# EAGLE board SparkFun_Qwiic_CO2_Sensor_XENSIV_PAS-Panel (EAGLE 9.6.2), part 1 of 3
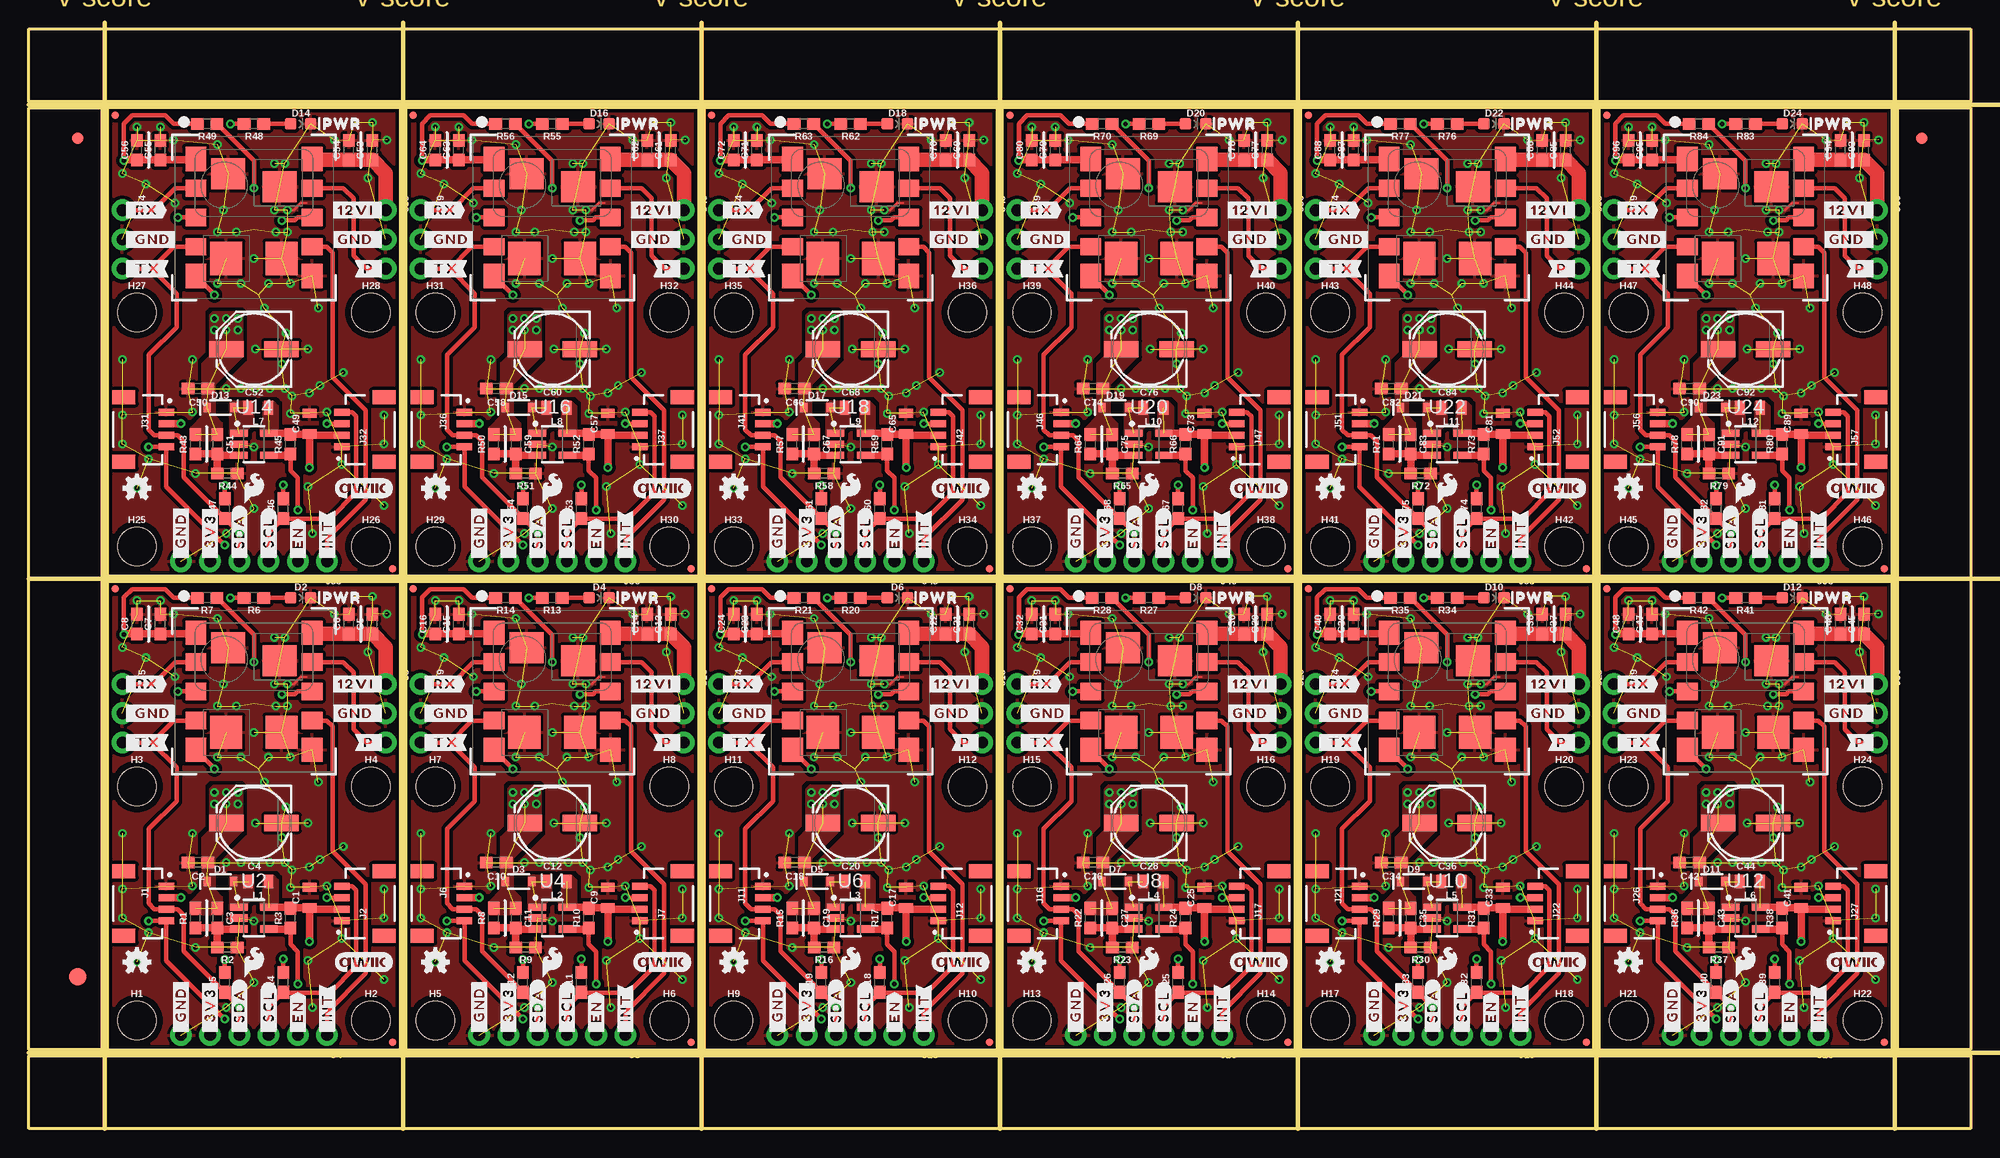
[diagram p0: board, top side]
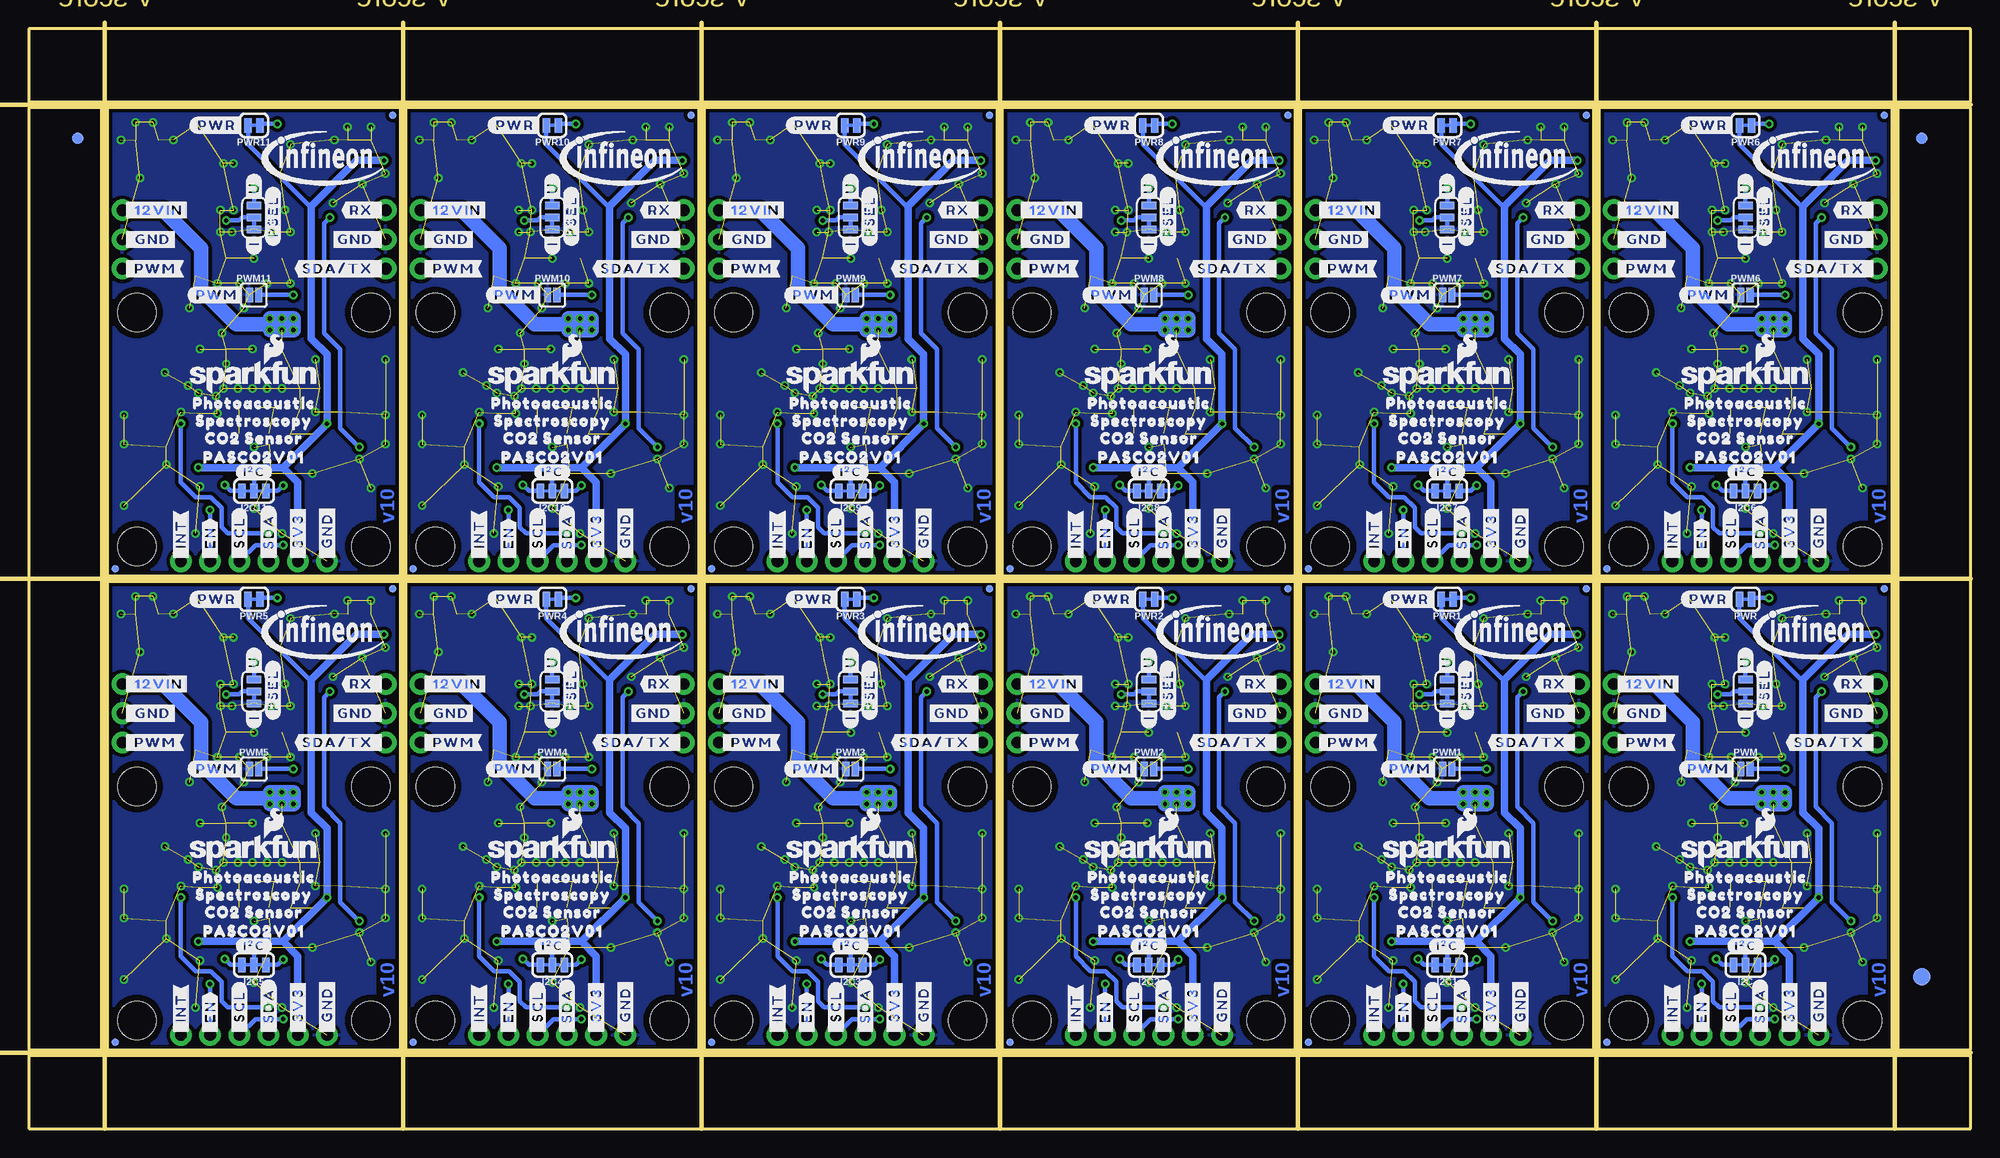
[diagram p1: board, bottom side, seen from below]

Size 168.66 x 95.5 mm. Coordinates in mm from the lower left corner, seen from the top.
Outline: 6.86,6.86 32.26,6.86 32.26,47.5 6.86,47.5 6.86,6.86
Outline: 32.77,6.86 58.17,6.86 58.17,47.5 32.77,47.5 32.77,6.86
Outline: 58.67,6.86 84.07,6.86 84.07,47.5 58.67,47.5 58.67,6.86
Outline: 84.58,6.86 109.98,6.86 109.98,47.5 84.58,47.5 84.58,6.86
Outline: 110.49,6.86 135.89,6.86 135.89,47.5 110.49,47.5 110.49,6.86
Outline: 136.4,6.86 161.8,6.86 161.8,47.5 136.4,47.5 136.4,6.86
Outline: 6.86,48.01 32.26,48.01 32.26,88.65 6.86,88.65 6.86,48.01
Outline: 32.77,48.01 58.17,48.01 58.17,88.65 32.77,88.65 32.77,48.01
Outline: 58.67,48.01 84.07,48.01 84.07,88.65 58.67,88.65 58.67,48.01
Outline: 84.58,48.01 109.98,48.01 109.98,88.65 84.58,88.65 84.58,48.01
Outline: 110.49,48.01 135.89,48.01 135.89,88.65 110.49,88.65 110.49,48.01
Outline: 136.4,48.01 161.8,48.01 161.8,88.65 136.4,88.65 136.4,48.01
Outline: 0,6.35 168.66,6.35 168.66,0 0,0 0,6.35
Outline: 162.31,88.65 168.66,88.65 168.66,6.86 162.31,6.86 162.31,88.65
Outline: 0,95.5 168.66,95.5 168.66,89.15 0,89.15 0,95.5
Outline: 0,88.65 6.35,88.65 6.35,6.86 0,6.86 0,88.65
Copper layers (1*16): Top 0.035mm / dielectric 1.5mm / Bottom 0.035mm
Design rules "SparkFun_Qwiic_CO2_Sensor_XENSIV_PAS": minimum track width 7mil, minimum drill 0.3mm, track to track 7mil, track to pad 7mil, pad to pad 7mil, via to via 7mil, smd to smd 7mil, copper to edge 7mil, drill to drill 7mil, minimum pad ring 7mil, minimum via ring 7mil, stop-mask expansion 3mil, vias tented up to drill 25mil, thermal gap 10mil
tRestrict: area 16.6,21.7 to 17,21.8; area 42.5,21.7 to 42.9,21.8; area 68.5,21.7 to 68.8,21.8; area 94.4,21.7 to 94.7,21.8; area 120.3,21.7 to 120.7,21.8; area 146.2,21.7 to 146.6,21.8; area 16.6,62.9 to 17,63; area 42.5,62.9 to 42.9,63; area 68.5,62.9 to 68.8,63; area 94.4,62.9 to 94.7,63; area 120.3,62.9 to 120.7,63; area 146.2,62.9 to 146.6,63
Milling: 10 lines

## Footprints (pad centres in the part's own frame; a part is rotated, then mirrored left to right if it is on the bottom)
0805 = smd 0.8 x 1.2: 1 -0.9,0; 2 0.9,0
0603 = smd 1.1 x 1: 1 -0.85,0; 2 0.85,0
PANASONIC_D = smd 3 x 1.4: + 2.4,0; - -2.4,0
SOD-323 = smd 0.63 x 0.83: A 1.15,0; C -1.15,0
LED-0603 = smd 1 x 1: A -0.877,0; C 0.877,0
FIDUCIAL-1X2 = smd 1 x 1: 1 0,0
FIDUCIAL-1.5X3 = smd 1.5 x 1.5: 1 0,0
FIDUCIAL-MICRO = smd 0.635 x 0.635: 1 0,0
STAND-OFF = hole 3.302: 0,0
SMT-JUMPER_3_2-NC_TRACE_SILK = smd 0.66 x 1.27: 1 -1.041,0; 2 0,0; 3 1.041,0
JST04_1MM_RA = smd 0.6 x 1.35: 1 -1.5,0; 2 -0.5,0; 3 0.5,0; 4 1.5,0 | smd 1.2 x 2: NC1 2.8,-3.675; NC2 -2.8,-3.675
1X03_NO_SILK = drill 1.016 pad 1.88: 1 0,0; 2 2.54,0; 3 5.08,0
1X06_NO_SILK = drill 1.016 pad 1.88: 1 0,0; 2 2.54,0; 3 5.08,0; 4 7.62,0; 5 10.16,0; 6 12.7,0
SMT-JUMPER_3_1-NC_TRACE_SILK = smd 0.66 x 1.27: 1 -1.041,0; 2 0,0; 3 1.041,0
SMT-JUMPER_2_NO_SILK = smd 0.635 x 1.27: 1 -0.406,0; 2 0.406,0
SMT-JUMPER_2_NC_TRACE_SILK = smd 0.66 x 1.27: 1 -0.521,0; 2 0.521,0
LG-MLGA-14-1_Z8B00206105 = smd 2.1 x 1.8: 1 -5.08,-5.05; 5 5.08,-5.05; 6 5.08,5.05; 10 -5.08,5.05 | smd 1.5 x 1.8: 2 -2.54,-5.05; 3 0,-5.05; 4 2.54,-5.05; 7 2.54,5.05; 8 0,5.05; 9 -2.54,5.05 | smd 2.7 x 2.95: 11 -2.655,2.245; 12 -3.805,-2.245 | smd 2.9 x 2.8: 13 3.55,-2.415; 14 3.55,2.415
SOT95P280X145-5M = smd 1.509 x 0.629: 1 -1.303,0.95; 2 -1.303,0; 3 -1.303,-0.95; 4 1.303,-0.95; 5 1.303,0.95

## Placement (x,y rotation side)
C1  10uF  [0805]  24.38,20.07 90 top
C2  4.7uF  [0603]  14.69,23.11 180 top
C3  470pF  [0603]  16.38,18.29 270 top
C4  47uF  [PANASONIC_D]  19.56,26.54 180 top
C5  0.1uF  [0603]  29.84,43.81 90 top
C6  10nF  [0603]  27.81,43.81 90 top
C7  0.1uF  [0603]  11.43,43.81 90 top
C8  4.7uF  [0603]  9.4,43.81 90 top
C9  10uF  [0805]  50.29,20.07 90 top
C10  4.7uF  [0603]  40.6,23.11 180 top
C11  470pF  [0603]  42.29,18.29 270 top
C12  47uF  [PANASONIC_D]  45.47,26.54 180 top
C13  0.1uF  [0603]  55.75,43.81 90 top
C14  10nF  [0603]  53.72,43.81 90 top
C15  0.1uF  [0603]  37.34,43.81 90 top
C16  4.7uF  [0603]  35.31,43.81 90 top
C17  10uF  [0805]  76.2,20.07 90 top
C18  4.7uF  [0603]  66.51,23.11 180 top
C19  470pF  [0603]  68.2,18.29 270 top
C20  47uF  [PANASONIC_D]  71.37,26.54 180 top
C21  0.1uF  [0603]  81.66,43.81 90 top
C22  10nF  [0603]  79.63,43.81 90 top
C23  0.1uF  [0603]  63.25,43.81 90 top
C24  4.7uF  [0603]  61.21,43.81 90 top
C25  10uF  [0805]  102.11,20.07 90 top
C26  4.7uF  [0603]  92.42,23.11 180 top
C27  470pF  [0603]  94.11,18.29 270 top
C28  47uF  [PANASONIC_D]  97.28,26.54 180 top
C29  0.1uF  [0603]  107.57,43.81 90 top
C30  10nF  [0603]  105.54,43.81 90 top
C31  0.1uF  [0603]  89.15,43.81 90 top
C32  4.7uF  [0603]  87.12,43.81 90 top
C33  10uF  [0805]  128.02,20.07 90 top
C34  4.7uF  [0603]  118.33,23.11 180 top
C35  470pF  [0603]  120.02,18.29 270 top
C36  47uF  [PANASONIC_D]  123.19,26.54 180 top
C37  0.1uF  [0603]  133.48,43.81 90 top
C38  10nF  [0603]  131.44,43.81 90 top
C39  0.1uF  [0603]  115.06,43.81 90 top
C40  4.7uF  [0603]  113.03,43.81 90 top
C41  10uF  [0805]  153.92,20.07 90 top
C42  4.7uF  [0603]  144.23,23.11 180 top
C43  470pF  [0603]  145.92,18.29 270 top
C44  47uF  [PANASONIC_D]  149.1,26.54 180 top
C45  0.1uF  [0603]  159.38,43.81 90 top
C46  10nF  [0603]  157.35,43.81 90 top
C47  0.1uF  [0603]  140.97,43.81 90 top
C48  4.7uF  [0603]  138.94,43.81 90 top
C49  10uF  [0805]  24.38,61.21 90 top
C50  4.7uF  [0603]  14.69,64.26 180 top
C51  470pF  [0603]  16.38,59.44 270 top
C52  47uF  [PANASONIC_D]  19.56,67.69 180 top
C53  0.1uF  [0603]  29.84,84.96 90 top
C54  10nF  [0603]  27.81,84.96 90 top
C55  0.1uF  [0603]  11.43,84.96 90 top
C56  4.7uF  [0603]  9.4,84.96 90 top
C57  10uF  [0805]  50.29,61.21 90 top
C58  4.7uF  [0603]  40.6,64.26 180 top
C59  470pF  [0603]  42.29,59.44 270 top
C60  47uF  [PANASONIC_D]  45.47,67.69 180 top
C61  0.1uF  [0603]  55.75,84.96 90 top
C62  10nF  [0603]  53.72,84.96 90 top
C63  0.1uF  [0603]  37.34,84.96 90 top
C64  4.7uF  [0603]  35.31,84.96 90 top
C65  10uF  [0805]  76.2,61.21 90 top
C66  4.7uF  [0603]  66.51,64.26 180 top
C67  470pF  [0603]  68.2,59.44 270 top
C68  47uF  [PANASONIC_D]  71.37,67.69 180 top
C69  0.1uF  [0603]  81.66,84.96 90 top
C70  10nF  [0603]  79.63,84.96 90 top
C71  0.1uF  [0603]  63.25,84.96 90 top
C72  4.7uF  [0603]  61.21,84.96 90 top
C73  10uF  [0805]  102.11,61.21 90 top
C74  4.7uF  [0603]  92.42,64.26 180 top
C75  470pF  [0603]  94.11,59.44 270 top
C76  47uF  [PANASONIC_D]  97.28,67.69 180 top
C77  0.1uF  [0603]  107.57,84.96 90 top
C78  10nF  [0603]  105.54,84.96 90 top
C79  0.1uF  [0603]  89.15,84.96 90 top
C80  4.7uF  [0603]  87.12,84.96 90 top
C81  10uF  [0805]  128.02,61.21 90 top
C82  4.7uF  [0603]  118.33,64.26 180 top
C83  470pF  [0603]  120.02,59.44 270 top
C84  47uF  [PANASONIC_D]  123.19,67.69 180 top
C85  0.1uF  [0603]  133.48,84.96 90 top
C86  10nF  [0603]  131.44,84.96 90 top
C87  0.1uF  [0603]  115.06,84.96 90 top
C88  4.7uF  [0603]  113.03,84.96 90 top
C89  10uF  [0805]  153.92,61.21 90 top
C90  4.7uF  [0603]  144.23,64.26 180 top
C91  470pF  [0603]  145.92,59.44 270 top
C92  47uF  [PANASONIC_D]  149.1,67.69 180 top
C93  0.1uF  [0603]  159.38,84.96 90 top
C94  10nF  [0603]  157.35,84.96 90 top
C95  0.1uF  [0603]  140.97,84.96 90 top
C96  4.7uF  [0603]  138.94,84.96 90 top
D1  0.5A/40V/420mV  [SOD-323]  16.64,21.46 0 top
D2  [LED-0603]  23.62,46.1 0 top
D3  0.5A/40V/420mV  [SOD-323]  42.54,21.46 0 top
D4  [LED-0603]  49.53,46.1 0 top
D5  0.5A/40V/420mV  [SOD-323]  68.45,21.46 0 top
D6  [LED-0603]  75.44,46.1 0 top
D7  0.5A/40V/420mV  [SOD-323]  94.36,21.46 0 top
D8  [LED-0603]  101.35,46.1 0 top
D9  0.5A/40V/420mV  [SOD-323]  120.27,21.46 0 top
D10  [LED-0603]  127.25,46.1 0 top
D11  0.5A/40V/420mV  [SOD-323]  146.18,21.46 0 top
D12  [LED-0603]  153.16,46.1 0 top
D13  0.5A/40V/420mV  [SOD-323]  16.64,62.61 0 top
D14  [LED-0603]  23.62,87.25 0 top
D15  0.5A/40V/420mV  [SOD-323]  42.54,62.61 0 top
D16  [LED-0603]  49.53,87.25 0 top
D17  0.5A/40V/420mV  [SOD-323]  68.45,62.61 0 top
D18  [LED-0603]  75.44,87.25 0 top
D19  0.5A/40V/420mV  [SOD-323]  94.36,62.61 0 top
D20  [LED-0603]  101.35,87.25 0 top
D21  0.5A/40V/420mV  [SOD-323]  120.27,62.61 0 top
D22  [LED-0603]  127.25,87.25 0 top
D23  0.5A/40V/420mV  [SOD-323]  146.18,62.61 0 top
D24  [LED-0603]  153.16,87.25 0 top
E$1  [FIDUCIAL-1X2]  4.23,85.98 0 top
E$2  [FIDUCIAL-1X2]  4.23,85.98 0 bottom
E$3  [FIDUCIAL-1X2]  164.42,85.98 0 top
E$4  [FIDUCIAL-1X2]  164.42,85.98 0 bottom
E$5  [FIDUCIAL-1.5X3]  4.23,13.21 0 top
E$6  [FIDUCIAL-1.5X3]  4.23,13.21 0 bottom
FD1  FIDUCIALUFIDUCIAL  [FIDUCIAL-MICRO]  31.62,7.49 0 bottom
FD2  FIDUCIALUFIDUCIAL  [FIDUCIAL-MICRO]  7.49,46.86 0 bottom
FD3  FIDUCIALUFIDUCIAL  [FIDUCIAL-MICRO]  7.49,46.86 0 top
FD4  FIDUCIALUFIDUCIAL  [FIDUCIAL-MICRO]  31.62,7.49 0 top
FD5  FIDUCIALUFIDUCIAL  [FIDUCIAL-MICRO]  57.53,7.49 0 bottom
FD6  FIDUCIALUFIDUCIAL  [FIDUCIAL-MICRO]  33.4,46.86 0 bottom
FD7  FIDUCIALUFIDUCIAL  [FIDUCIAL-MICRO]  33.4,46.86 0 top
FD8  FIDUCIALUFIDUCIAL  [FIDUCIAL-MICRO]  57.53,7.49 0 top
FD9  FIDUCIALUFIDUCIAL  [FIDUCIAL-MICRO]  83.44,7.49 0 bottom
FD10  FIDUCIALUFIDUCIAL  [FIDUCIAL-MICRO]  59.31,46.86 0 bottom
FD11  FIDUCIALUFIDUCIAL  [FIDUCIAL-MICRO]  59.31,46.86 0 top
FD12  FIDUCIALUFIDUCIAL  [FIDUCIAL-MICRO]  83.44,7.49 0 top
FD13  FIDUCIALUFIDUCIAL  [FIDUCIAL-MICRO]  109.35,7.49 0 bottom
FD14  FIDUCIALUFIDUCIAL  [FIDUCIAL-MICRO]  85.22,46.86 0 bottom
FD15  FIDUCIALUFIDUCIAL  [FIDUCIAL-MICRO]  85.22,46.86 0 top
FD16  FIDUCIALUFIDUCIAL  [FIDUCIAL-MICRO]  109.35,7.49 0 top
FD17  FIDUCIALUFIDUCIAL  [FIDUCIAL-MICRO]  135.25,7.49 0 bottom
FD18  FIDUCIALUFIDUCIAL  [FIDUCIAL-MICRO]  111.12,46.86 0 bottom
FD19  FIDUCIALUFIDUCIAL  [FIDUCIAL-MICRO]  111.12,46.86 0 top
FD20  FIDUCIALUFIDUCIAL  [FIDUCIAL-MICRO]  135.25,7.49 0 top
FD21  FIDUCIALUFIDUCIAL  [FIDUCIAL-MICRO]  161.16,7.49 0 bottom
FD22  FIDUCIALUFIDUCIAL  [FIDUCIAL-MICRO]  137.03,46.86 0 bottom
FD23  FIDUCIALUFIDUCIAL  [FIDUCIAL-MICRO]  137.03,46.86 0 top
FD24  FIDUCIALUFIDUCIAL  [FIDUCIAL-MICRO]  161.16,7.49 0 top
FD25  FIDUCIALUFIDUCIAL  [FIDUCIAL-MICRO]  31.62,48.64 0 bottom
FD26  FIDUCIALUFIDUCIAL  [FIDUCIAL-MICRO]  7.49,88.01 0 bottom
FD27  FIDUCIALUFIDUCIAL  [FIDUCIAL-MICRO]  7.49,88.01 0 top
FD28  FIDUCIALUFIDUCIAL  [FIDUCIAL-MICRO]  31.62,48.64 0 top
FD29  FIDUCIALUFIDUCIAL  [FIDUCIAL-MICRO]  57.53,48.64 0 bottom
FD30  FIDUCIALUFIDUCIAL  [FIDUCIAL-MICRO]  33.4,88.01 0 bottom
FD31  FIDUCIALUFIDUCIAL  [FIDUCIAL-MICRO]  33.4,88.01 0 top
FD32  FIDUCIALUFIDUCIAL  [FIDUCIAL-MICRO]  57.53,48.64 0 top
FD33  FIDUCIALUFIDUCIAL  [FIDUCIAL-MICRO]  83.44,48.64 0 bottom
FD34  FIDUCIALUFIDUCIAL  [FIDUCIAL-MICRO]  59.31,88.01 0 bottom
FD35  FIDUCIALUFIDUCIAL  [FIDUCIAL-MICRO]  59.31,88.01 0 top
FD36  FIDUCIALUFIDUCIAL  [FIDUCIAL-MICRO]  83.44,48.64 0 top
FD37  FIDUCIALUFIDUCIAL  [FIDUCIAL-MICRO]  109.35,48.64 0 bottom
FD38  FIDUCIALUFIDUCIAL  [FIDUCIAL-MICRO]  85.22,88.01 0 bottom
FD39  FIDUCIALUFIDUCIAL  [FIDUCIAL-MICRO]  85.22,88.01 0 top
FD40  FIDUCIALUFIDUCIAL  [FIDUCIAL-MICRO]  109.35,48.64 0 top
FD41  FIDUCIALUFIDUCIAL  [FIDUCIAL-MICRO]  135.25,48.64 0 bottom
FD42  FIDUCIALUFIDUCIAL  [FIDUCIAL-MICRO]  111.12,88.01 0 bottom
FD43  FIDUCIALUFIDUCIAL  [FIDUCIAL-MICRO]  111.12,88.01 0 top
FD44  FIDUCIALUFIDUCIAL  [FIDUCIAL-MICRO]  135.25,48.64 0 top
FD45  FIDUCIALUFIDUCIAL  [FIDUCIAL-MICRO]  161.16,48.64 0 bottom
FD46  FIDUCIALUFIDUCIAL  [FIDUCIAL-MICRO]  137.03,88.01 0 bottom
FD47  FIDUCIALUFIDUCIAL  [FIDUCIAL-MICRO]  137.03,88.01 0 top
FD48  FIDUCIALUFIDUCIAL  [FIDUCIAL-MICRO]  161.16,48.64 0 top
H1  STAND-OFF  [STAND-OFF]  9.4,9.4 0 top
H2  STAND-OFF  [STAND-OFF]  29.72,9.4 0 top
H3  STAND-OFF  [STAND-OFF]  9.4,29.72 0 top
H4  STAND-OFF  [STAND-OFF]  29.72,29.72 0 top
H5  STAND-OFF  [STAND-OFF]  35.31,9.4 0 top
H6  STAND-OFF  [STAND-OFF]  55.63,9.4 0 top
H7  STAND-OFF  [STAND-OFF]  35.31,29.72 0 top
H8  STAND-OFF  [STAND-OFF]  55.63,29.72 0 top
H9  STAND-OFF  [STAND-OFF]  61.21,9.4 0 top
H10  STAND-OFF  [STAND-OFF]  81.53,9.4 0 top
H11  STAND-OFF  [STAND-OFF]  61.21,29.72 0 top
H12  STAND-OFF  [STAND-OFF]  81.53,29.72 0 top
H13  STAND-OFF  [STAND-OFF]  87.12,9.4 0 top
H14  STAND-OFF  [STAND-OFF]  107.44,9.4 0 top
H15  STAND-OFF  [STAND-OFF]  87.12,29.72 0 top
H16  STAND-OFF  [STAND-OFF]  107.44,29.72 0 top
H17  STAND-OFF  [STAND-OFF]  113.03,9.4 0 top
H18  STAND-OFF  [STAND-OFF]  133.35,9.4 0 top
H19  STAND-OFF  [STAND-OFF]  113.03,29.72 0 top
H20  STAND-OFF  [STAND-OFF]  133.35,29.72 0 top
H21  STAND-OFF  [STAND-OFF]  138.94,9.4 0 top
H22  STAND-OFF  [STAND-OFF]  159.26,9.4 0 top
H23  STAND-OFF  [STAND-OFF]  138.94,29.72 0 top
H24  STAND-OFF  [STAND-OFF]  159.26,29.72 0 top
H25  STAND-OFF  [STAND-OFF]  9.4,50.55 0 top
H26  STAND-OFF  [STAND-OFF]  29.72,50.55 0 top
H27  STAND-OFF  [STAND-OFF]  9.4,70.87 0 top
H28  STAND-OFF  [STAND-OFF]  29.72,70.87 0 top
H29  STAND-OFF  [STAND-OFF]  35.31,50.55 0 top
H30  STAND-OFF  [STAND-OFF]  55.63,50.55 0 top
H31  STAND-OFF  [STAND-OFF]  35.31,70.87 0 top
H32  STAND-OFF  [STAND-OFF]  55.63,70.87 0 top
H33  STAND-OFF  [STAND-OFF]  61.21,50.55 0 top
H34  STAND-OFF  [STAND-OFF]  81.53,50.55 0 top
H35  STAND-OFF  [STAND-OFF]  61.21,70.87 0 top
H36  STAND-OFF  [STAND-OFF]  81.53,70.87 0 top
H37  STAND-OFF  [STAND-OFF]  87.12,50.55 0 top
H38  STAND-OFF  [STAND-OFF]  107.44,50.55 0 top
H39  STAND-OFF  [STAND-OFF]  87.12,70.87 0 top
H40  STAND-OFF  [STAND-OFF]  107.44,70.87 0 top
H41  STAND-OFF  [STAND-OFF]  113.03,50.55 0 top
H42  STAND-OFF  [STAND-OFF]  133.35,50.55 0 top
H43  STAND-OFF  [STAND-OFF]  113.03,70.87 0 top
H44  STAND-OFF  [STAND-OFF]  133.35,70.87 0 top
H45  STAND-OFF  [STAND-OFF]  138.94,50.55 0 top
H46  STAND-OFF  [STAND-OFF]  159.26,50.55 0 top
H47  STAND-OFF  [STAND-OFF]  138.94,70.87 0 top
H48  STAND-OFF  [STAND-OFF]  159.26,70.87 0 top
I2C  JUMPER-SMT_3_2-NC_TRACE_SILK  [SMT-JUMPER_3_2-NC_TRACE_SILK]  19.56,14.22 180 bottom
I2C1  JUMPER-SMT_3_2-NC_TRACE_SILK  [SMT-JUMPER_3_2-NC_TRACE_SILK]  45.47,14.22 180 bottom
I2C2  JUMPER-SMT_3_2-NC_TRACE_SILK  [SMT-JUMPER_3_2-NC_TRACE_SILK]  71.37,14.22 180 bottom
I2C3  JUMPER-SMT_3_2-NC_TRACE_SILK  [SMT-JUMPER_3_2-NC_TRACE_SILK]  97.28,14.22 180 bottom
I2C4  JUMPER-SMT_3_2-NC_TRACE_SILK  [SMT-JUMPER_3_2-NC_TRACE_SILK]  123.19,14.22 180 bottom
I2C5  JUMPER-SMT_3_2-NC_TRACE_SILK  [SMT-JUMPER_3_2-NC_TRACE_SILK]  149.1,14.22 180 bottom
I2C6  JUMPER-SMT_3_2-NC_TRACE_SILK  [SMT-JUMPER_3_2-NC_TRACE_SILK]  19.56,55.37 180 bottom
I2C7  JUMPER-SMT_3_2-NC_TRACE_SILK  [SMT-JUMPER_3_2-NC_TRACE_SILK]  45.47,55.37 180 bottom
I2C8  JUMPER-SMT_3_2-NC_TRACE_SILK  [SMT-JUMPER_3_2-NC_TRACE_SILK]  71.37,55.37 180 bottom
I2C9  JUMPER-SMT_3_2-NC_TRACE_SILK  [SMT-JUMPER_3_2-NC_TRACE_SILK]  97.28,55.37 180 bottom
I2C10  JUMPER-SMT_3_2-NC_TRACE_SILK  [SMT-JUMPER_3_2-NC_TRACE_SILK]  123.19,55.37 180 bottom
I2C11  JUMPER-SMT_3_2-NC_TRACE_SILK  [SMT-JUMPER_3_2-NC_TRACE_SILK]  149.1,55.37 180 bottom
J1  QWIIC_RA  [JST04_1MM_RA]  11.94,19.56 270 top
J2  QWIIC_RA  [JST04_1MM_RA]  27.18,19.56 90 top
J3  [1X03_NO_SILK]  30.99,38.61 270 top
J4  [1X06_NO_SILK]  25.91,8.13 180 top
J5  [1X03_NO_SILK]  8.13,38.61 270 top
J6  QWIIC_RA  [JST04_1MM_RA]  37.85,19.56 270 top
J7  QWIIC_RA  [JST04_1MM_RA]  53.09,19.56 90 top
J8  [1X06_NO_SILK]  51.82,8.13 180 top
J9  [1X03_NO_SILK]  34.04,38.61 270 top
J10  [1X03_NO_SILK]  56.9,38.61 270 top
J11  QWIIC_RA  [JST04_1MM_RA]  63.75,19.56 270 top
J12  QWIIC_RA  [JST04_1MM_RA]  78.99,19.56 90 top
J13  [1X06_NO_SILK]  77.72,8.13 180 top
J14  [1X03_NO_SILK]  59.94,38.61 270 top
J15  [1X03_NO_SILK]  82.8,38.61 270 top
J16  QWIIC_RA  [JST04_1MM_RA]  89.66,19.56 270 top
J17  QWIIC_RA  [JST04_1MM_RA]  104.9,19.56 90 top
J18  [1X06_NO_SILK]  103.63,8.13 180 top
J19  [1X03_NO_SILK]  85.85,38.61 270 top
J20  [1X03_NO_SILK]  108.71,38.61 270 top
J21  QWIIC_RA  [JST04_1MM_RA]  115.57,19.56 270 top
J22  QWIIC_RA  [JST04_1MM_RA]  130.81,19.56 90 top
J23  [1X06_NO_SILK]  129.54,8.13 180 top
J24  [1X03_NO_SILK]  111.76,38.61 270 top
J25  [1X03_NO_SILK]  134.62,38.61 270 top
J26  QWIIC_RA  [JST04_1MM_RA]  141.48,19.56 270 top
J27  QWIIC_RA  [JST04_1MM_RA]  156.72,19.56 90 top
J28  [1X06_NO_SILK]  155.45,8.13 180 top
J29  [1X03_NO_SILK]  137.67,38.61 270 top
J30  [1X03_NO_SILK]  160.53,38.61 270 top
J31  QWIIC_RA  [JST04_1MM_RA]  11.94,60.71 270 top
J32  QWIIC_RA  [JST04_1MM_RA]  27.18,60.71 90 top
J33  [1X06_NO_SILK]  25.91,49.28 180 top
J34  [1X03_NO_SILK]  8.13,79.76 270 top
J35  [1X03_NO_SILK]  30.99,79.76 270 top
J36  QWIIC_RA  [JST04_1MM_RA]  37.85,60.71 270 top
J37  QWIIC_RA  [JST04_1MM_RA]  53.09,60.71 90 top
J38  [1X06_NO_SILK]  51.82,49.28 180 top
J39  [1X03_NO_SILK]  34.04,79.76 270 top
J40  [1X03_NO_SILK]  56.9,79.76 270 top
J41  QWIIC_RA  [JST04_1MM_RA]  63.75,60.71 270 top
J42  QWIIC_RA  [JST04_1MM_RA]  78.99,60.71 90 top
J43  [1X06_NO_SILK]  77.72,49.28 180 top
J44  [1X03_NO_SILK]  59.94,79.76 270 top
J45  [1X03_NO_SILK]  82.8,79.76 270 top
J46  QWIIC_RA  [JST04_1MM_RA]  89.66,60.71 270 top
J47  QWIIC_RA  [JST04_1MM_RA]  104.9,60.71 90 top
J48  [1X06_NO_SILK]  103.63,49.28 180 top
J49  [1X03_NO_SILK]  85.85,79.76 270 top
J50  [1X03_NO_SILK]  108.71,79.76 270 top
J51  QWIIC_RA  [JST04_1MM_RA]  115.57,60.71 270 top
J52  QWIIC_RA  [JST04_1MM_RA]  130.81,60.71 90 top
J53  [1X06_NO_SILK]  129.54,49.28 180 top
J54  [1X03_NO_SILK]  111.76,79.76 270 top
J55  [1X03_NO_SILK]  134.62,79.76 270 top
J56  QWIIC_RA  [JST04_1MM_RA]  141.48,60.71 270 top
J57  QWIIC_RA  [JST04_1MM_RA]  156.72,60.71 90 top
J58  [1X06_NO_SILK]  155.45,49.28 180 top
J59  [1X03_NO_SILK]  137.67,79.76 270 top
J60  [1X03_NO_SILK]  160.53,79.76 270 top
L1  10uH  [0805]  19.94,21.46 180 top
L2  10uH  [0805]  45.85,21.46 180 top
L3  10uH  [0805]  71.76,21.46 180 top
L4  10uH  [0805]  97.66,21.46 180 top
L5  10uH  [0805]  123.57,21.46 180 top
L6  10uH  [0805]  149.48,21.46 180 top
L7  10uH  [0805]  19.94,62.61 180 top
L8  10uH  [0805]  45.85,62.61 180 top
L9  10uH  [0805]  71.76,62.61 180 top
L10  10uH  [0805]  97.66,62.61 180 top
L11  10uH  [0805]  123.57,62.61 180 top
L12  10uH  [0805]  149.48,62.61 180 top
LOGO1  SFE_LOGO_NAME_FLAME.1_INCH  [SFE_LOGO_NAME_FLAME_.1]  19.56,24.13 0 bottom
LOGO2  QWIIC_LOGO_5MM  [QWIIC_5MM]  29.08,14.48 0 top
LOGO3  OSHW-LOGOMINI  [OSHW-LOGO-MINI]  9.4,14.48 0 top
LOGO4  SFE_LOGO_NAME_FLAME.1_INCH  [SFE_LOGO_NAME_FLAME_.1]  45.47,24.13 0 bottom
LOGO5  QWIIC_LOGO_5MM  [QWIIC_5MM]  54.99,14.48 0 top
LOGO6  OSHW-LOGOMINI  [OSHW-LOGO-MINI]  35.31,14.48 0 top
LOGO7  SFE_LOGO_NAME_FLAME.1_INCH  [SFE_LOGO_NAME_FLAME_.1]  71.37,24.13 0 bottom
LOGO8  QWIIC_LOGO_5MM  [QWIIC_5MM]  80.9,14.48 0 top
LOGO9  OSHW-LOGOMINI  [OSHW-LOGO-MINI]  61.21,14.48 0 top
LOGO10  SFE_LOGO_NAME_FLAME.1_INCH  [SFE_LOGO_NAME_FLAME_.1]  97.28,24.13 0 bottom
LOGO11  QWIIC_LOGO_5MM  [QWIIC_5MM]  106.81,14.48 0 top
LOGO12  OSHW-LOGOMINI  [OSHW-LOGO-MINI]  87.12,14.48 0 top
LOGO13  SFE_LOGO_NAME_FLAME.1_INCH  [SFE_LOGO_NAME_FLAME_.1]  123.19,24.13 0 bottom
LOGO14  QWIIC_LOGO_5MM  [QWIIC_5MM]  132.72,14.48 0 top
LOGO15  OSHW-LOGOMINI  [OSHW-LOGO-MINI]  113.03,14.48 0 top
LOGO16  SFE_LOGO_NAME_FLAME.1_INCH  [SFE_LOGO_NAME_FLAME_.1]  149.1,24.13 0 bottom
LOGO17  QWIIC_LOGO_5MM  [QWIIC_5MM]  158.62,14.48 0 top
LOGO18  OSHW-LOGOMINI  [OSHW-LOGO-MINI]  138.94,14.48 0 top
LOGO19  SFE_LOGO_NAME_FLAME.1_INCH  [SFE_LOGO_NAME_FLAME_.1]  19.56,65.28 0 bottom
LOGO20  QWIIC_LOGO_5MM  [QWIIC_5MM]  29.08,55.63 0 top
LOGO21  OSHW-LOGOMINI  [OSHW-LOGO-MINI]  9.4,55.63 0 top
LOGO22  SFE_LOGO_NAME_FLAME.1_INCH  [SFE_LOGO_NAME_FLAME_.1]  45.47,65.28 0 bottom
LOGO23  QWIIC_LOGO_5MM  [QWIIC_5MM]  54.99,55.63 0 top
LOGO24  OSHW-LOGOMINI  [OSHW-LOGO-MINI]  35.31,55.63 0 top
LOGO25  SFE_LOGO_NAME_FLAME.1_INCH  [SFE_LOGO_NAME_FLAME_.1]  71.37,65.28 0 bottom
LOGO26  QWIIC_LOGO_5MM  [QWIIC_5MM]  80.9,55.63 0 top
LOGO27  OSHW-LOGOMINI  [OSHW-LOGO-MINI]  61.21,55.63 0 top
LOGO28  SFE_LOGO_NAME_FLAME.1_INCH  [SFE_LOGO_NAME_FLAME_.1]  97.28,65.28 0 bottom
LOGO29  QWIIC_LOGO_5MM  [QWIIC_5MM]  106.81,55.63 0 top
LOGO30  OSHW-LOGOMINI  [OSHW-LOGO-MINI]  87.12,55.63 0 top
LOGO31  SFE_LOGO_NAME_FLAME.1_INCH  [SFE_LOGO_NAME_FLAME_.1]  123.19,65.28 0 bottom
LOGO32  QWIIC_LOGO_5MM  [QWIIC_5MM]  132.72,55.63 0 top
LOGO33  OSHW-LOGOMINI  [OSHW-LOGO-MINI]  113.03,55.63 0 top
LOGO34  SFE_LOGO_NAME_FLAME.1_INCH  [SFE_LOGO_NAME_FLAME_.1]  149.1,65.28 0 bottom
LOGO35  QWIIC_LOGO_5MM  [QWIIC_5MM]  158.62,55.63 0 top
LOGO36  OSHW-LOGOMINI  [OSHW-LOGO-MINI]  138.94,55.63 0 top
PSEL  JUMPER-SMT_3_1-NC_TRACE_SILK  [SMT-JUMPER_3_1-NC_TRACE_SILK]  19.56,37.97 270 bottom
PSEL1  JUMPER-SMT_3_1-NC_TRACE_SILK  [SMT-JUMPER_3_1-NC_TRACE_SILK]  45.47,37.97 270 bottom
PSEL2  JUMPER-SMT_3_1-NC_TRACE_SILK  [SMT-JUMPER_3_1-NC_TRACE_SILK]  71.37,37.97 270 bottom
PSEL3  JUMPER-SMT_3_1-NC_TRACE_SILK  [SMT-JUMPER_3_1-NC_TRACE_SILK]  97.28,37.97 270 bottom
PSEL4  JUMPER-SMT_3_1-NC_TRACE_SILK  [SMT-JUMPER_3_1-NC_TRACE_SILK]  123.19,37.97 270 bottom
PSEL5  JUMPER-SMT_3_1-NC_TRACE_SILK  [SMT-JUMPER_3_1-NC_TRACE_SILK]  149.1,37.97 270 bottom
PSEL6  JUMPER-SMT_3_1-NC_TRACE_SILK  [SMT-JUMPER_3_1-NC_TRACE_SILK]  19.56,79.12 270 bottom
PSEL7  JUMPER-SMT_3_1-NC_TRACE_SILK  [SMT-JUMPER_3_1-NC_TRACE_SILK]  45.47,79.12 270 bottom
PSEL8  JUMPER-SMT_3_1-NC_TRACE_SILK  [SMT-JUMPER_3_1-NC_TRACE_SILK]  71.37,79.12 270 bottom
PSEL9  JUMPER-SMT_3_1-NC_TRACE_SILK  [SMT-JUMPER_3_1-NC_TRACE_SILK]  97.28,79.12 270 bottom
PSEL10  JUMPER-SMT_3_1-NC_TRACE_SILK  [SMT-JUMPER_3_1-NC_TRACE_SILK]  123.19,79.12 270 bottom
PSEL11  JUMPER-SMT_3_1-NC_TRACE_SILK  [SMT-JUMPER_3_1-NC_TRACE_SILK]  149.1,79.12 270 bottom
PWM  JUMPER-SMT_2_NO_SILK  [SMT-JUMPER_2_NO_SILK]  19.56,31.24 0 bottom
PWM1  JUMPER-SMT_2_NO_SILK  [SMT-JUMPER_2_NO_SILK]  45.47,31.24 0 bottom
PWM2  JUMPER-SMT_2_NO_SILK  [SMT-JUMPER_2_NO_SILK]  71.37,31.24 0 bottom
PWM3  JUMPER-SMT_2_NO_SILK  [SMT-JUMPER_2_NO_SILK]  97.28,31.24 0 bottom
PWM4  JUMPER-SMT_2_NO_SILK  [SMT-JUMPER_2_NO_SILK]  123.19,31.24 0 bottom
PWM5  JUMPER-SMT_2_NO_SILK  [SMT-JUMPER_2_NO_SILK]  149.1,31.24 0 bottom
PWM6  JUMPER-SMT_2_NO_SILK  [SMT-JUMPER_2_NO_SILK]  19.56,72.39 0 bottom
PWM7  JUMPER-SMT_2_NO_SILK  [SMT-JUMPER_2_NO_SILK]  45.47,72.39 0 bottom
PWM8  JUMPER-SMT_2_NO_SILK  [SMT-JUMPER_2_NO_SILK]  71.37,72.39 0 bottom
PWM9  JUMPER-SMT_2_NO_SILK  [SMT-JUMPER_2_NO_SILK]  97.28,72.39 0 bottom
PWM10  JUMPER-SMT_2_NO_SILK  [SMT-JUMPER_2_NO_SILK]  123.19,72.39 0 bottom
PWM11  JUMPER-SMT_2_NO_SILK  [SMT-JUMPER_2_NO_SILK]  149.1,72.39 0 bottom
PWR  JUMPER-SMT_2_NC_TRACE_SILK  [SMT-JUMPER_2_NC_TRACE_SILK]  19.56,45.97 180 bottom
PWR1  JUMPER-SMT_2_NC_TRACE_SILK  [SMT-JUMPER_2_NC_TRACE_SILK]  45.47,45.97 180 bottom
PWR2  JUMPER-SMT_2_NC_TRACE_SILK  [SMT-JUMPER_2_NC_TRACE_SILK]  71.37,45.97 180 bottom
PWR3  JUMPER-SMT_2_NC_TRACE_SILK  [SMT-JUMPER_2_NC_TRACE_SILK]  97.28,45.97 180 bottom
PWR4  JUMPER-SMT_2_NC_TRACE_SILK  [SMT-JUMPER_2_NC_TRACE_SILK]  123.19,45.97 180 bottom
PWR5  JUMPER-SMT_2_NC_TRACE_SILK  [SMT-JUMPER_2_NC_TRACE_SILK]  149.1,45.97 180 bottom
PWR6  JUMPER-SMT_2_NC_TRACE_SILK  [SMT-JUMPER_2_NC_TRACE_SILK]  19.56,87.12 180 bottom
PWR7  JUMPER-SMT_2_NC_TRACE_SILK  [SMT-JUMPER_2_NC_TRACE_SILK]  45.47,87.12 180 bottom
PWR8  JUMPER-SMT_2_NC_TRACE_SILK  [SMT-JUMPER_2_NC_TRACE_SILK]  71.37,87.12 180 bottom
PWR9  JUMPER-SMT_2_NC_TRACE_SILK  [SMT-JUMPER_2_NC_TRACE_SILK]  97.28,87.12 180 bottom
PWR10  JUMPER-SMT_2_NC_TRACE_SILK  [SMT-JUMPER_2_NC_TRACE_SILK]  123.19,87.12 180 bottom
PWR11  JUMPER-SMT_2_NC_TRACE_SILK  [SMT-JUMPER_2_NC_TRACE_SILK]  149.1,87.12 180 bottom
R1  47k  [0603]  14.48,18.29 90 top
R2  5.62k  [0603]  17.25,15.75 180 top
R3  100k  [0603]  22.73,18.29 90 top
R4  2.2k  [0603]  22.1,12.7 90 top
R5  2.2k  [0603]  17.02,12.7 90 top
R6  4.7k  [0603]  19.56,46.1 180 top
R7  10k  [0603]  15.49,46.1 180 top
R8  47k  [0603]  40.39,18.29 90 top
R9  5.62k  [0603]  43.15,15.75 180 top
R10  100k  [0603]  48.64,18.29 90 top
R11  2.2k  [0603]  48.01,12.7 90 top
R12  2.2k  [0603]  42.93,12.7 90 top
R13  4.7k  [0603]  45.47,46.1 180 top
R14  10k  [0603]  41.4,46.1 180 top
R15  47k  [0603]  66.29,18.29 90 top
R16  5.62k  [0603]  69.06,15.75 180 top
R17  100k  [0603]  74.55,18.29 90 top
R18  2.2k  [0603]  73.91,12.7 90 top
R19  2.2k  [0603]  68.83,12.7 90 top
R20  4.7k  [0603]  71.37,46.1 180 top
R21  10k  [0603]  67.31,46.1 180 top
R22  47k  [0603]  92.2,18.29 90 top
R23  5.62k  [0603]  94.97,15.75 180 top
R24  100k  [0603]  100.46,18.29 90 top
R25  2.2k  [0603]  99.82,12.7 90 top
R26  2.2k  [0603]  94.74,12.7 90 top
R27  4.7k  [0603]  97.28,46.1 180 top
R28  10k  [0603]  93.22,46.1 180 top
R29  47k  [0603]  118.11,18.29 90 top
R30  5.62k  [0603]  120.88,15.75 180 top
R31  100k  [0603]  126.37,18.29 90 top
R32  2.2k  [0603]  125.73,12.7 90 top
R33  2.2k  [0603]  120.65,12.7 90 top
R34  4.7k  [0603]  123.19,46.1 180 top
R35  10k  [0603]  119.13,46.1 180 top
R36  47k  [0603]  144.02,18.29 90 top
R37  5.62k  [0603]  146.79,15.75 180 top
R38  100k  [0603]  152.27,18.29 90 top
R39  2.2k  [0603]  151.64,12.7 90 top
R40  2.2k  [0603]  146.56,12.7 90 top
R41  4.7k  [0603]  149.1,46.1 180 top
R42  10k  [0603]  145.03,46.1 180 top
R43  47k  [0603]  14.48,59.44 90 top
R44  5.62k  [0603]  17.25,56.9 180 top
R45  100k  [0603]  22.73,59.44 90 top
R46  2.2k  [0603]  22.1,53.85 90 top
R47  2.2k  [0603]  17.02,53.85 90 top
R48  4.7k  [0603]  19.56,87.25 180 top
R49  10k  [0603]  15.49,87.25 180 top
R50  47k  [0603]  40.39,59.44 90 top
R51  5.62k  [0603]  43.15,56.9 180 top
R52  100k  [0603]  48.64,59.44 90 top
R53  2.2k  [0603]  48.01,53.85 90 top
R54  2.2k  [0603]  42.93,53.85 90 top
R55  4.7k  [0603]  45.47,87.25 180 top
R56  10k  [0603]  41.4,87.25 180 top
R57  47k  [0603]  66.29,59.44 90 top
R58  5.62k  [0603]  69.06,56.9 180 top
R59  100k  [0603]  74.55,59.44 90 top
R60  2.2k  [0603]  73.91,53.85 90 top
R61  2.2k  [0603]  68.83,53.85 90 top
R62  4.7k  [0603]  71.37,87.25 180 top
R63  10k  [0603]  67.31,87.25 180 top
R64  47k  [0603]  92.2,59.44 90 top
R65  5.62k  [0603]  94.97,56.9 180 top
R66  100k  [0603]  100.46,59.44 90 top
R67  2.2k  [0603]  99.82,53.85 90 top
R68  2.2k  [0603]  94.74,53.85 90 top
R69  4.7k  [0603]  97.28,87.25 180 top
R70  10k  [0603]  93.22,87.25 180 top
R71  47k  [0603]  118.11,59.44 90 top
R72  5.62k  [0603]  120.88,56.9 180 top
R73  100k  [0603]  126.37,59.44 90 top
R74  2.2k  [0603]  125.73,53.85 90 top
R75  2.2k  [0603]  120.65,53.85 90 top
R76  4.7k  [0603]  123.19,87.25 180 top
R77  10k  [0603]  119.13,87.25 180 top
R78  47k  [0603]  144.02,59.44 90 top
R79  5.62k  [0603]  146.79,56.9 180 top
R80  100k  [0603]  152.27,59.44 90 top
R81  2.2k  [0603]  151.64,53.85 90 top
R82  2.2k  [0603]  146.56,53.85 90 top
R83  4.7k  [0603]  149.1,87.25 180 top
R84  10k  [0603]  145.03,87.25 180 top
U1  PASCO2V01BUMA1  [LG-MLGA-14-1_Z8B00206105]  19.56,37.97 270 top
U2  AP3012  [SOT95P280X145-5M]  19.56,18.29 0 top
U3  PASCO2V01BUMA1  [LG-MLGA-14-1_Z8B00206105]  45.47,37.97 270 top
U4  AP3012  [SOT95P280X145-5M]  45.47,18.29 0 top
U5  PASCO2V01BUMA1  [LG-MLGA-14-1_Z8B00206105]  71.37,37.97 270 top
U6  AP3012  [SOT95P280X145-5M]  71.37,18.29 0 top
U7  PASCO2V01BUMA1  [LG-MLGA-14-1_Z8B00206105]  97.28,37.97 270 top
U8  AP3012  [SOT95P280X145-5M]  97.28,18.29 0 top
U9  PASCO2V01BUMA1  [LG-MLGA-14-1_Z8B00206105]  123.19,37.97 270 top
U10  AP3012  [SOT95P280X145-5M]  123.19,18.29 0 top
U11  PASCO2V01BUMA1  [LG-MLGA-14-1_Z8B00206105]  149.1,37.97 270 top
U12  AP3012  [SOT95P280X145-5M]  149.1,18.29 0 top
U13  PASCO2V01BUMA1  [LG-MLGA-14-1_Z8B00206105]  19.56,79.12 270 top
U14  AP3012  [SOT95P280X145-5M]  19.56,59.44 0 top
U15  PASCO2V01BUMA1  [LG-MLGA-14-1_Z8B00206105]  45.47,79.12 270 top
U16  AP3012  [SOT95P280X145-5M]  45.47,59.44 0 top
U17  PASCO2V01BUMA1  [LG-MLGA-14-1_Z8B00206105]  71.37,79.12 270 top
U18  AP3012  [SOT95P280X145-5M]  71.37,59.44 0 top
U19  PASCO2V01BUMA1  [LG-MLGA-14-1_Z8B00206105]  97.28,79.12 270 top
U20  AP3012  [SOT95P280X145-5M]  97.28,59.44 0 top
U21  PASCO2V01BUMA1  [LG-MLGA-14-1_Z8B00206105]  123.19,79.12 270 top
U22  AP3012  [SOT95P280X145-5M]  123.19,59.44 0 top
U23  PASCO2V01BUMA1  [LG-MLGA-14-1_Z8B00206105]  149.1,79.12 270 top
U24  AP3012  [SOT95P280X145-5M]  149.1,59.44 0 top
U$1  [SFE_LOGO_FLAME_.1]  19.56,14.48 0 top
U$2  [#_12VIN#0]  30.99,38.61 0 bottom
U$3  [#_EN#0]  23.37,8.13 90 top
U$4  [#GND_#0]  30.99,36.07 0 top
U$5  [#GND_#0]  8.13,36.07 0 bottom
U$6  [#_TX#0]  8.13,33.53 0 top
U$7  [#_RX#0]  8.13,38.61 0 top
U$8  [#_GND#0]  8.13,36.07 0 top
U$9  [#_GND#0]  30.99,36.07 0 bottom
U$10  [#_EN#0]  23.37,8.13 90 bottom
U$11  [#_3V3#0]  15.75,8.13 90 bottom
U$12  [#RX_#0]  8.13,38.61 0 bottom
U$13  [#SDA#TX_#0]  8.13,33.53 0 bottom
U$14  [#_GND#0]  13.21,8.13 90 top
U$15  [#_SCL#0]  20.83,8.13 90 top
U$16  [#PWM#0]  20.32,31.24 0 bottom
U$17  [#P_#0]  30.99,33.53 0 top
U$18  [#_GND#0]  13.21,8.13 90 bottom
U$19  [#_3V3#0]  15.75,8.13 90 top
U$20  [#_SDA#0]  18.29,8.13 90 top
U$21  [#_INT#0]  25.91,8.13 90 top
U$22  [#_INT#0]  25.91,8.13 90 bottom
U$23  [INFINEON_LOGO]  14.44,44.22 0 bottom
U$24  [#PSEL#0]  17.91,35.56 90 bottom
U$25  [CO2_SENSOR0]  19.56,18.8 0 bottom
U$26  [SFE_LOGO_FLAME_STOP_.1]  29.72,43.69 0 bottom
U$27  [#I�C#0]  19.56,15.88 0 bottom
U$28  [#PWR#0]  20.45,45.97 0 bottom
U$29  [PWR0]  27.18,46.1 0 top
U$30  [SFE_LOGO_FLAME_.1]  45.47,14.48 0 top
U$31  [#I#0]  19.56,35.69 90 bottom
U$32  [#U#0]  19.56,40.51 90 bottom
U$33  [#12VI_#0]  30.99,38.61 0 top
U$34  [#_PWM#0]  30.99,33.53 0 bottom
U$35  [#_SDA#0]  18.29,8.13 90 bottom
U$36  [#_SCL#0]  20.83,8.13 90 bottom
U$37  [PHOTOACOUSTIC0]  19.56,21.84 0 bottom
U$38  [SPECTROSCOPY0]  19.56,20.32 0 bottom
U$39  [PASCO2V010]  19.56,17.14 0 bottom
U$40  [#GND_#0]  56.9,36.07 0 top
U$41  [#GND_#0]  34.04,36.07 0 bottom
U$42  [#_TX#0]  34.04,33.53 0 top
U$43  [#_RX#0]  34.04,38.61 0 top
U$44  [#_GND#0]  34.04,36.07 0 top
U$45  [#_GND#0]  56.9,36.07 0 bottom
U$46  [#RX_#0]  34.04,38.61 0 bottom
U$47  [#SDA#TX_#0]  34.04,33.53 0 bottom
U$48  [#_GND#0]  39.12,8.13 90 top
U$49  [#_SCL#0]  46.74,8.13 90 top
U$50  [#_GND#0]  39.12,8.13 90 bottom
U$51  [#_3V3#0]  41.66,8.13 90 top
U$52  [#_INT#0]  51.82,8.13 90 top
U$53  [#_INT#0]  51.82,8.13 90 bottom
U$54  [#PSEL#0]  43.81,35.56 90 bottom
U$55  [#I�C#0]  45.47,15.88 0 bottom
U$56  [SFE_LOGO_FLAME_STOP_.1]  55.63,43.69 0 bottom
U$57  [PWR0]  53.09,46.1 0 top
U$58  [#U#0]  45.47,40.51 90 bottom
U$59  [#I#0]  45.47,35.69 90 bottom
U$60  [#12VI_#0]  56.9,38.61 0 top
U$61  [#_12VIN#0]  56.9,38.61 0 bottom
U$62  [#_EN#0]  49.28,8.13 90 top
U$63  [#_EN#0]  49.28,8.13 90 bottom
U$64  [#_3V3#0]  41.66,8.13 90 bottom
U$65  [#P_#0]  56.9,33.53 0 top
U$66  [#_PWM#0]  56.9,33.53 0 bottom
U$67  [#PWM#0]  46.23,31.24 0 bottom
U$68  [#PWR#0]  46.35,45.97 0 bottom
U$69  [#_SDA#0]  44.2,8.13 90 top
U$70  [#_SDA#0]  44.2,8.13 90 bottom
U$71  [#_SCL#0]  46.74,8.13 90 bottom
U$72  [PHOTOACOUSTIC0]  45.47,21.84 0 bottom
U$73  [SPECTROSCOPY0]  45.47,20.32 0 bottom
U$74  [CO2_SENSOR0]  45.47,18.8 0 bottom
U$75  [PASCO2V010]  45.47,17.14 0 bottom
U$76  [INFINEON_LOGO]  40.35,44.22 0 bottom
U$77  [SFE_LOGO_FLAME_.1]  71.37,14.48 0 top
U$78  [#GND_#0]  82.8,36.07 0 top
U$79  [#GND_#0]  59.94,36.07 0 bottom
U$80  [#_TX#0]  59.94,33.53 0 top
U$81  [#_RX#0]  59.94,38.61 0 top
U$82  [#_GND#0]  59.94,36.07 0 top
U$83  [#_GND#0]  82.8,36.07 0 bottom
U$84  [#RX_#0]  59.94,38.61 0 bottom
U$85  [#SDA#TX_#0]  59.94,33.53 0 bottom
U$86  [#_GND#0]  65.02,8.13 90 top
U$87  [#_SCL#0]  72.64,8.13 90 top
U$88  [#_GND#0]  65.02,8.13 90 bottom
U$89  [#_3V3#0]  67.56,8.13 90 top
U$90  [#_INT#0]  77.72,8.13 90 top
U$91  [#_INT#0]  77.72,8.13 90 bottom
U$92  [#PSEL#0]  69.72,35.56 90 bottom
U$93  [#I�C#0]  71.37,15.88 0 bottom
U$94  [SFE_LOGO_FLAME_STOP_.1]  81.53,43.69 0 bottom
U$95  [PWR0]  78.99,46.1 0 top
U$96  [#U#0]  71.37,40.51 90 bottom
U$97  [#I#0]  71.37,35.69 90 bottom
U$98  [#12VI_#0]  82.8,38.61 0 top
U$99  [#_12VIN#0]  82.8,38.61 0 bottom
U$100  [#_EN#0]  75.18,8.13 90 top
U$101  [#_EN#0]  75.18,8.13 90 bottom
U$102  [#_3V3#0]  67.56,8.13 90 bottom
U$103  [#P_#0]  82.8,33.53 0 top
U$104  [#_PWM#0]  82.8,33.53 0 bottom
U$105  [#PWM#0]  72.14,31.24 0 bottom
U$106  [#PWR#0]  72.26,45.97 0 bottom
U$107  [#_SDA#0]  70.1,8.13 90 top
U$108  [#_SDA#0]  70.1,8.13 90 bottom
U$109  [#_SCL#0]  72.64,8.13 90 bottom
U$110  [PHOTOACOUSTIC0]  71.37,21.84 0 bottom
U$111  [SPECTROSCOPY0]  71.37,20.32 0 bottom
U$112  [CO2_SENSOR0]  71.37,18.8 0 bottom
U$113  [PASCO2V010]  71.37,17.14 0 bottom
U$114  [INFINEON_LOGO]  66.25,44.22 0 bottom
U$115  [SFE_LOGO_FLAME_.1]  97.28,14.48 0 top
U$116  [#GND_#0]  108.71,36.07 0 top
U$117  [#GND_#0]  85.85,36.07 0 bottom
U$118  [#_TX#0]  85.85,33.53 0 top
U$119  [#_RX#0]  85.85,38.61 0 top
U$120  [#_GND#0]  85.85,36.07 0 top
U$121  [#_GND#0]  108.71,36.07 0 bottom
U$122  [#RX_#0]  85.85,38.61 0 bottom
U$123  [#SDA#TX_#0]  85.85,33.53 0 bottom
U$124  [#_GND#0]  90.93,8.13 90 top
U$125  [#_SCL#0]  98.55,8.13 90 top
U$126  [#_GND#0]  90.93,8.13 90 bottom
U$127  [#_3V3#0]  93.47,8.13 90 top
U$128  [#_INT#0]  103.63,8.13 90 top
U$129  [#_INT#0]  103.63,8.13 90 bottom
U$130  [#PSEL#0]  95.63,35.56 90 bottom
U$131  [#I�C#0]  97.28,15.88 0 bottom
U$132  [SFE_LOGO_FLAME_STOP_.1]  107.44,43.69 0 bottom
U$133  [PWR0]  104.9,46.1 0 top
U$134  [#U#0]  97.28,40.51 90 bottom
U$135  [#I#0]  97.28,35.69 90 bottom
U$136  [#12VI_#0]  108.71,38.61 0 top
U$137  [#_12VIN#0]  108.71,38.61 0 bottom
U$138  [#_EN#0]  101.09,8.13 90 top
U$139  [#_EN#0]  101.09,8.13 90 bottom
U$140  [#_3V3#0]  93.47,8.13 90 bottom
U$141  [#P_#0]  108.71,33.53 0 top
U$142  [#_PWM#0]  108.71,33.53 0 bottom
U$143  [#PWM#0]  98.04,31.24 0 bottom
U$144  [#PWR#0]  98.17,45.97 0 bottom
U$145  [#_SDA#0]  96.01,8.13 90 top
U$146  [#_SDA#0]  96.01,8.13 90 bottom
U$147  [#_SCL#0]  98.55,8.13 90 bottom
U$148  [PHOTOACOUSTIC0]  97.28,21.84 0 bottom
U$149  [SPECTROSCOPY0]  97.28,20.32 0 bottom
U$150  [CO2_SENSOR0]  97.28,18.8 0 bottom
U$151  [PASCO2V010]  97.28,17.14 0 bottom
U$152  [INFINEON_LOGO]  92.16,44.22 0 bottom
U$153  [SFE_LOGO_FLAME_.1]  123.19,14.48 0 top
U$154  [#GND_#0]  134.62,36.07 0 top
U$155  [#GND_#0]  111.76,36.07 0 bottom
U$156  [#_TX#0]  111.76,33.53 0 top
U$157  [#_RX#0]  111.76,38.61 0 top
U$158  [#_GND#0]  111.76,36.07 0 top
U$159  [#_GND#0]  134.62,36.07 0 bottom
U$160  [#RX_#0]  111.76,38.61 0 bottom
U$161  [#SDA#TX_#0]  111.76,33.53 0 bottom
U$162  [#_GND#0]  116.84,8.13 90 top
U$163  [#_SCL#0]  124.46,8.13 90 top
U$164  [#_GND#0]  116.84,8.13 90 bottom
U$165  [#_3V3#0]  119.38,8.13 90 top
U$166  [#_INT#0]  129.54,8.13 90 top
U$167  [#_INT#0]  129.54,8.13 90 bottom
U$168  [#PSEL#0]  121.54,35.56 90 bottom
U$169  [#I�C#0]  123.19,15.88 0 bottom
U$170  [SFE_LOGO_FLAME_STOP_.1]  133.35,43.69 0 bottom
U$171  [PWR0]  130.81,46.1 0 top
U$172  [#U#0]  123.19,40.51 90 bottom
U$173  [#I#0]  123.19,35.69 90 bottom
U$174  [#12VI_#0]  134.62,38.61 0 top
U$175  [#_12VIN#0]  134.62,38.61 0 bottom
U$176  [#_EN#0]  127,8.13 90 top
U$177  [#_EN#0]  127,8.13 90 bottom
U$178  [#_3V3#0]  119.38,8.13 90 bottom
U$179  [#P_#0]  134.62,33.53 0 top
U$180  [#_PWM#0]  134.62,33.53 0 bottom
U$181  [#PWM#0]  123.95,31.24 0 bottom
U$182  [#PWR#0]  124.08,45.97 0 bottom
U$183  [#_SDA#0]  121.92,8.13 90 top
U$184  [#_SDA#0]  121.92,8.13 90 bottom
U$185  [#_SCL#0]  124.46,8.13 90 bottom
U$186  [PHOTOACOUSTIC0]  123.19,21.84 0 bottom
U$187  [SPECTROSCOPY0]  123.19,20.32 0 bottom
U$188  [CO2_SENSOR0]  123.19,18.8 0 bottom
U$189  [PASCO2V010]  123.19,17.14 0 bottom
U$190  [INFINEON_LOGO]  118.07,44.22 0 bottom
U$191  [SFE_LOGO_FLAME_.1]  149.1,14.48 0 top
U$192  [#GND_#0]  160.53,36.07 0 top
U$193  [#GND_#0]  137.67,36.07 0 bottom
U$194  [#_TX#0]  137.67,33.53 0 top
U$195  [#_RX#0]  137.67,38.61 0 top
U$196  [#_GND#0]  137.67,36.07 0 top
U$197  [#_GND#0]  160.53,36.07 0 bottom
U$198  [#RX_#0]  137.67,38.61 0 bottom
U$199  [#SDA#TX_#0]  137.67,33.53 0 bottom
U$200  [#_GND#0]  142.75,8.13 90 top
U$201  [#_SCL#0]  150.37,8.13 90 top
U$202  [#_GND#0]  142.75,8.13 90 bottom
U$203  [#_3V3#0]  145.29,8.13 90 top
U$204  [#_INT#0]  155.45,8.13 90 top
U$205  [#_INT#0]  155.45,8.13 90 bottom
U$206  [#PSEL#0]  147.45,35.56 90 bottom
U$207  [#I�C#0]  149.1,15.88 0 bottom
U$208  [SFE_LOGO_FLAME_STOP_.1]  159.26,43.69 0 bottom
U$209  [PWR0]  156.72,46.1 0 top
U$210  [#U#0]  149.1,40.51 90 bottom
U$211  [#I#0]  149.1,35.69 90 bottom
U$212  [#12VI_#0]  160.53,38.61 0 top
U$213  [#_12VIN#0]  160.53,38.61 0 bottom
U$214  [#_EN#0]  152.91,8.13 90 top
U$215  [#_EN#0]  152.91,8.13 90 bottom
U$216  [#_3V3#0]  145.29,8.13 90 bottom
U$217  [#P_#0]  160.53,33.53 0 top
U$218  [#_PWM#0]  160.53,33.53 0 bottom
U$219  [#PWM#0]  149.86,31.24 0 bottom
U$220  [#PWR#0]  149.99,45.97 0 bottom
U$221  [#_SDA#0]  147.83,8.13 90 top
U$222  [#_SDA#0]  147.83,8.13 90 bottom
U$223  [#_SCL#0]  150.37,8.13 90 bottom
U$224  [PHOTOACOUSTIC0]  149.1,21.84 0 bottom
U$225  [SPECTROSCOPY0]  149.1,20.32 0 bottom
U$226  [CO2_SENSOR0]  149.1,18.8 0 bottom
U$227  [PASCO2V010]  149.1,17.14 0 bottom
U$228  [INFINEON_LOGO]  143.98,44.22 0 bottom
U$229  [SFE_LOGO_FLAME_.1]  19.56,55.63 0 top
U$230  [#GND_#0]  30.99,77.22 0 top
U$231  [#GND_#0]  8.13,77.22 0 bottom
U$232  [#_TX#0]  8.13,74.68 0 top
U$233  [#_RX#0]  8.13,79.76 0 top
U$234  [#_GND#0]  8.13,77.22 0 top
U$235  [#_GND#0]  30.99,77.22 0 bottom
U$236  [#RX_#0]  8.13,79.76 0 bottom
U$237  [#SDA#TX_#0]  8.13,74.68 0 bottom
U$238  [#_GND#0]  13.21,49.28 90 top
U$239  [#_SCL#0]  20.83,49.28 90 top
U$240  [#_GND#0]  13.21,49.28 90 bottom
U$241  [#_3V3#0]  15.75,49.28 90 top
U$242  [#_INT#0]  25.91,49.28 90 top
U$243  [#_INT#0]  25.91,49.28 90 bottom
U$244  [#PSEL#0]  17.91,76.71 90 bottom
U$245  [#I�C#0]  19.56,57.02 0 bottom
U$246  [SFE_LOGO_FLAME_STOP_.1]  29.72,84.84 0 bottom
U$247  [PWR0]  27.18,87.25 0 top
U$248  [#U#0]  19.56,81.66 90 bottom
U$249  [#I#0]  19.56,76.84 90 bottom
U$250  [#12VI_#0]  30.99,79.76 0 top
U$251  [#_12VIN#0]  30.99,79.76 0 bottom
U$252  [#_EN#0]  23.37,49.28 90 top
U$253  [#_EN#0]  23.37,49.28 90 bottom
U$254  [#_3V3#0]  15.75,49.28 90 bottom
U$255  [#P_#0]  30.99,74.68 0 top
U$256  [#_PWM#0]  30.99,74.68 0 bottom
U$257  [#PWM#0]  20.32,72.39 0 bottom
U$258  [#PWR#0]  20.45,87.12 0 bottom
U$259  [#_SDA#0]  18.29,49.28 90 top
U$260  [#_SDA#0]  18.29,49.28 90 bottom
U$261  [#_SCL#0]  20.83,49.28 90 bottom
U$262  [PHOTOACOUSTIC0]  19.56,62.99 0 bottom
U$263  [SPECTROSCOPY0]  19.56,61.47 0 bottom
U$264  [CO2_SENSOR0]  19.56,59.94 0 bottom
U$265  [PASCO2V010]  19.56,58.29 0 bottom
U$266  [INFINEON_LOGO]  14.44,85.37 0 bottom
U$267  [SFE_LOGO_FLAME_.1]  45.47,55.63 0 top
U$268  [#GND_#0]  56.9,77.22 0 top
U$269  [#GND_#0]  34.04,77.22 0 bottom
U$270  [#_TX#0]  34.04,74.68 0 top
U$271  [#_RX#0]  34.04,79.76 0 top
U$272  [#_GND#0]  34.04,77.22 0 top
U$273  [#_GND#0]  56.9,77.22 0 bottom
U$274  [#RX_#0]  34.04,79.76 0 bottom
U$275  [#SDA#TX_#0]  34.04,74.68 0 bottom
U$276  [#_GND#0]  39.12,49.28 90 top
U$277  [#_SCL#0]  46.74,49.28 90 top
U$278  [#_GND#0]  39.12,49.28 90 bottom
U$279  [#_3V3#0]  41.66,49.28 90 top
U$280  [#_INT#0]  51.82,49.28 90 top
U$281  [#_INT#0]  51.82,49.28 90 bottom
U$282  [#PSEL#0]  43.81,76.71 90 bottom
U$283  [#I�C#0]  45.47,57.02 0 bottom
U$284  [SFE_LOGO_FLAME_STOP_.1]  55.63,84.84 0 bottom
U$285  [PWR0]  53.09,87.25 0 top
U$286  [#U#0]  45.47,81.66 90 bottom
U$287  [#I#0]  45.47,76.84 90 bottom
U$288  [#12VI_#0]  56.9,79.76 0 top
U$289  [#_12VIN#0]  56.9,79.76 0 bottom
U$290  [#_EN#0]  49.28,49.28 90 top
U$291  [#_EN#0]  49.28,49.28 90 bottom
U$292  [#_3V3#0]  41.66,49.28 90 bottom
U$293  [#P_#0]  56.9,74.68 0 top
U$294  [#_PWM#0]  56.9,74.68 0 bottom
U$295  [#PWM#0]  46.23,72.39 0 bottom
U$296  [#PWR#0]  46.35,87.12 0 bottom
U$297  [#_SDA#0]  44.2,49.28 90 top
U$298  [#_SDA#0]  44.2,49.28 90 bottom
U$299  [#_SCL#0]  46.74,49.28 90 bottom
U$300  [PHOTOACOUSTIC0]  45.47,62.99 0 bottom
U$301  [SPECTROSCOPY0]  45.47,61.47 0 bottom
U$302  [CO2_SENSOR0]  45.47,59.94 0 bottom
U$303  [PASCO2V010]  45.47,58.29 0 bottom
U$304  [INFINEON_LOGO]  40.35,85.37 0 bottom
U$305  [SFE_LOGO_FLAME_.1]  71.37,55.63 0 top
U$306  [#GND_#0]  82.8,77.22 0 top
U$307  [#GND_#0]  59.94,77.22 0 bottom
U$308  [#_TX#0]  59.94,74.68 0 top
U$309  [#_RX#0]  59.94,79.76 0 top
U$310  [#_GND#0]  59.94,77.22 0 top
U$311  [#_GND#0]  82.8,77.22 0 bottom
U$312  [#RX_#0]  59.94,79.76 0 bottom
U$313  [#SDA#TX_#0]  59.94,74.68 0 bottom
U$314  [#_GND#0]  65.02,49.28 90 top
U$315  [#_SCL#0]  72.64,49.28 90 top
U$316  [#_GND#0]  65.02,49.28 90 bottom
U$317  [#_3V3#0]  67.56,49.28 90 top
U$318  [#_INT#0]  77.72,49.28 90 top
U$319  [#_INT#0]  77.72,49.28 90 bottom
U$320  [#PSEL#0]  69.72,76.71 90 bottom
U$321  [#I�C#0]  71.37,57.02 0 bottom
U$322  [SFE_LOGO_FLAME_STOP_.1]  81.53,84.84 0 bottom
U$323  [PWR0]  78.99,87.25 0 top
U$324  [#U#0]  71.37,81.66 90 bottom
U$325  [#I#0]  71.37,76.84 90 bottom
U$326  [#12VI_#0]  82.8,79.76 0 top
U$327  [#_12VIN#0]  82.8,79.76 0 bottom
U$328  [#_EN#0]  75.18,49.28 90 top
U$329  [#_EN#0]  75.18,49.28 90 bottom
U$330  [#_3V3#0]  67.56,49.28 90 bottom
U$331  [#P_#0]  82.8,74.68 0 top
U$332  [#_PWM#0]  82.8,74.68 0 bottom
U$333  [#PWM#0]  72.14,72.39 0 bottom
U$334  [#PWR#0]  72.26,87.12 0 bottom
U$335  [#_SDA#0]  70.1,49.28 90 top
U$336  [#_SDA#0]  70.1,49.28 90 bottom
U$337  [#_SCL#0]  72.64,49.28 90 bottom
U$338  [PHOTOACOUSTIC0]  71.37,62.99 0 bottom
U$339  [SPECTROSCOPY0]  71.37,61.47 0 bottom
U$340  [CO2_SENSOR0]  71.37,59.94 0 bottom
U$341  [PASCO2V010]  71.37,58.29 0 bottom
U$342  [INFINEON_LOGO]  66.25,85.37 0 bottom
U$343  [SFE_LOGO_FLAME_.1]  97.28,55.63 0 top
U$344  [#GND_#0]  108.71,77.22 0 top
U$345  [#GND_#0]  85.85,77.22 0 bottom
U$346  [#_TX#0]  85.85,74.68 0 top
U$347  [#_RX#0]  85.85,79.76 0 top
U$348  [#_GND#0]  85.85,77.22 0 top
U$349  [#_GND#0]  108.71,77.22 0 bottom
U$350  [#RX_#0]  85.85,79.76 0 bottom
U$351  [#SDA#TX_#0]  85.85,74.68 0 bottom
U$352  [#_GND#0]  90.93,49.28 90 top
U$353  [#_SCL#0]  98.55,49.28 90 top
U$354  [#_GND#0]  90.93,49.28 90 bottom
U$355  [#_3V3#0]  93.47,49.28 90 top
U$356  [#_INT#0]  103.63,49.28 90 top
U$357  [#_INT#0]  103.63,49.28 90 bottom
U$358  [#PSEL#0]  95.63,76.71 90 bottom
U$359  [#I�C#0]  97.28,57.02 0 bottom
U$360  [SFE_LOGO_FLAME_STOP_.1]  107.44,84.84 0 bottom
U$361  [PWR0]  104.9,87.25 0 top
U$362  [#U#0]  97.28,81.66 90 bottom
U$363  [#I#0]  97.28,76.84 90 bottom
U$364  [#12VI_#0]  108.71,79.76 0 top
U$365  [#_12VIN#0]  108.71,79.76 0 bottom
U$366  [#_EN#0]  101.09,49.28 90 top
U$367  [#_EN#0]  101.09,49.28 90 bottom
U$368  [#_3V3#0]  93.47,49.28 90 bottom
U$369  [#P_#0]  108.71,74.68 0 top
U$370  [#_PWM#0]  108.71,74.68 0 bottom
U$371  [#PWM#0]  98.04,72.39 0 bottom
U$372  [#PWR#0]  98.17,87.12 0 bottom
U$373  [#_SDA#0]  96.01,49.28 90 top
U$374  [#_SDA#0]  96.01,49.28 90 bottom
U$375  [#_SCL#0]  98.55,49.28 90 bottom
U$376  [PHOTOACOUSTIC0]  97.28,62.99 0 bottom
U$377  [SPECTROSCOPY0]  97.28,61.47 0 bottom
U$378  [CO2_SENSOR0]  97.28,59.94 0 bottom
U$379  [PASCO2V010]  97.28,58.29 0 bottom
U$380  [INFINEON_LOGO]  92.16,85.37 0 bottom
U$381  [SFE_LOGO_FLAME_.1]  123.19,55.63 0 top
U$382  [#GND_#0]  134.62,77.22 0 top
U$383  [#GND_#0]  111.76,77.22 0 bottom
U$384  [#_TX#0]  111.76,74.68 0 top
U$385  [#_RX#0]  111.76,79.76 0 top
U$386  [#_GND#0]  111.76,77.22 0 top
U$387  [#_GND#0]  134.62,77.22 0 bottom
U$388  [#RX_#0]  111.76,79.76 0 bottom
U$389  [#SDA#TX_#0]  111.76,74.68 0 bottom
U$390  [#_GND#0]  116.84,49.28 90 top
U$391  [#_SCL#0]  124.46,49.28 90 top
U$392  [#_GND#0]  116.84,49.28 90 bottom
U$393  [#_3V3#0]  119.38,49.28 90 top
U$394  [#_INT#0]  129.54,49.28 90 top
U$395  [#_INT#0]  129.54,49.28 90 bottom
U$396  [#PSEL#0]  121.54,76.71 90 bottom
U$397  [#I�C#0]  123.19,57.02 0 bottom
U$398  [SFE_LOGO_FLAME_STOP_.1]  133.35,84.84 0 bottom
U$399  [PWR0]  130.81,87.25 0 top
U$400  [#U#0]  123.19,81.66 90 bottom
U$401  [#I#0]  123.19,76.84 90 bottom
U$402  [#12VI_#0]  134.62,79.76 0 top
U$403  [#_12VIN#0]  134.62,79.76 0 bottom
U$404  [#_EN#0]  127,49.28 90 top
U$405  [#_EN#0]  127,49.28 90 bottom
U$406  [#_3V3#0]  119.38,49.28 90 bottom
U$407  [#P_#0]  134.62,74.68 0 top
U$408  [#_PWM#0]  134.62,74.68 0 bottom
U$409  [#PWM#0]  123.95,72.39 0 bottom
U$410  [#PWR#0]  124.08,87.12 0 bottom
U$411  [#_SDA#0]  121.92,49.28 90 top
U$412  [#_SDA#0]  121.92,49.28 90 bottom
U$413  [#_SCL#0]  124.46,49.28 90 bottom
U$414  [PHOTOACOUSTIC0]  123.19,62.99 0 bottom
U$415  [SPECTROSCOPY0]  123.19,61.47 0 bottom
U$416  [CO2_SENSOR0]  123.19,59.94 0 bottom
U$417  [PASCO2V010]  123.19,58.29 0 bottom
U$418  [INFINEON_LOGO]  118.07,85.37 0 bottom
U$419  [SFE_LOGO_FLAME_.1]  149.1,55.63 0 top
U$420  [#GND_#0]  160.53,77.22 0 top
U$421  [#GND_#0]  137.67,77.22 0 bottom
U$422  [#_TX#0]  137.67,74.68 0 top
U$423  [#_RX#0]  137.67,79.76 0 top
U$424  [#_GND#0]  137.67,77.22 0 top
U$425  [#_GND#0]  160.53,77.22 0 bottom
U$426  [#RX_#0]  137.67,79.76 0 bottom
U$427  [#SDA#TX_#0]  137.67,74.68 0 bottom
U$428  [#_GND#0]  142.75,49.28 90 top
U$429  [#_SCL#0]  150.37,49.28 90 top
U$430  [#_GND#0]  142.75,49.28 90 bottom
U$431  [#_3V3#0]  145.29,49.28 90 top
U$432  [#_INT#0]  155.45,49.28 90 top
U$433  [#_INT#0]  155.45,49.28 90 bottom
U$434  [#PSEL#0]  147.45,76.71 90 bottom
U$435  [#I�C#0]  149.1,57.02 0 bottom
U$436  [SFE_LOGO_FLAME_STOP_.1]  159.26,84.84 0 bottom
U$437  [PWR0]  156.72,87.25 0 top
U$438  [#U#0]  149.1,81.66 90 bottom
U$439  [#I#0]  149.1,76.84 90 bottom
U$440  [#12VI_#0]  160.53,79.76 0 top
U$441  [#_12VIN#0]  160.53,79.76 0 bottom
U$442  [#_EN#0]  152.91,49.28 90 top
U$443  [#_EN#0]  152.91,49.28 90 bottom
U$444  [#_3V3#0]  145.29,49.28 90 bottom
U$445  [#P_#0]  160.53,74.68 0 top
U$446  [#_PWM#0]  160.53,74.68 0 bottom
U$447  [#PWM#0]  149.86,72.39 0 bottom
U$448  [#PWR#0]  149.99,87.12 0 bottom
U$449  [#_SDA#0]  147.83,49.28 90 top
U$450  [#_SDA#0]  147.83,49.28 90 bottom
U$451  [#_SCL#0]  150.37,49.28 90 bottom
U$452  [PHOTOACOUSTIC0]  149.1,62.99 0 bottom
U$453  [SPECTROSCOPY0]  149.1,61.47 0 bottom
U$454  [CO2_SENSOR0]  149.1,59.94 0 bottom
U$455  [PASCO2V010]  149.1,58.29 0 bottom
U$456  [INFINEON_LOGO]  143.98,85.37 0 bottom

## Library data of the parts
C1 C9 C17 C25 C33 C41 C49 C57 C65 C73 C81 C89 = SparkFun-Capacitors; PROD_ID: CAP-14259
C2 C8 C10 C16 C18 C24 C26 C32 C34 C40 C42 C48 C50 C56 C58 C64 C66 C72 C74 C80 C82 C88 C90 C96 = SparkFun-Capacitors; PROD_ID: CAP-14106
C3 C11 C19 C27 C35 C43 C51 C59 C67 C75 C83 C91 = SparkFun-Capacitors; PROD_ID: CAP-07884
C4 C12 C20 C28 C36 C44 C52 C60 C68 C76 C84 C92 = SparkFun-Capacitors; PROD_ID: CAP-08478
C5 C7 C13 C15 C21 C23 C29 C31 C37 C39 C45 C47 C53 C55 C61 C63 C69 C71 C77 C79 C85 C87 C93 C95 = SparkFun-Capacitors; PROD_ID: CAP-08604
C6 C14 C22 C30 C38 C46 C54 C62 C70 C78 C86 C94 = SparkFun-Capacitors; PROD_ID: CAP-00867
D1 D3 D5 D7 D9 D11 D13 D15 D17 D19 D21 D23 = SparkFun-DiscreteSemi; PROD_ID: DIO-10955
D2 D4 D6 D8 D10 D12 D14 D16 D18 D20 D22 D24 = SparkFun-LED; PROD_ID: DIO-17976
E$1-E$4 FD1-FD48 LOGO1-LOGO36 U$1 U$26 U$30 U$56 U$77 U$94 U$115 U$132 U$153 U$170 U$191 U$208 U$229 U$246 U$267 U$284 U$305 U$322 U$343 U$360 U$381 U$398 U$419 U$436 = SparkFun-Aesthetics
E$5 E$6 = SparkFun-Retired
H1-H48 = SparkFun-Hardware
I2C I2C1-I2C11 PSEL PSEL1-PSEL11 PWM PWM1-PWM11 PWR PWR1-PWR11 = SparkFun-Jumpers
J1 J2 J6 J7 J11 J12 J16 J17 J21 J22 J26 J27 J31 J32 J36 J37 J41 J42 J46 J47 J51 J52 J56 J57 = SparkFun-Connectors; PROD_ID: CONN-13694
J3-J5 J8-J10 J13-J15 J18-J20 J23-J25 J28-J30 J33-J35 J38-J40 J43-J45 J48-J50 J53-J55 J58-J60 = SparkFun-Connectors
L1-L12 = xensiv_pas; PN: MLZ2012M100WT000; PROD_ID: NDUC-19198
R1 R8 R15 R22 R29 R36 R43 R50 R57 R64 R71 R78 = SparkFun-Resistors; PROD_ID: RES-07871
R2 R9 R16 R23 R30 R37 R44 R51 R58 R65 R72 R79 = SparkFun-Resistors; PROD_ID: RES-09823
R3 R10 R17 R24 R31 R38 R45 R52 R59 R66 R73 R80 = SparkFun-Resistors; PROD_ID: RES-07828
R4 R5 R11 R12 R18 R19 R25 R26 R32 R33 R39 R40 R46 R47 R53 R54 R60 R61 R67 R68 R74 R75 R81 R82 = SparkFun-Resistors; PROD_ID: RES-08272
R6 R13 R20 R27 R34 R41 R48 R55 R62 R69 R76 R83 = SparkFun-Resistors; PROD_ID: RES-07857
R7 R14 R21 R28 R35 R42 R49 R56 R63 R70 R77 R84 = SparkFun-Resistors; PROD_ID: RES-00824
U1 U3 U5 U7 U9 U11 U13 U15 U17 U19 U21 U23 = xensiv_pas; PROD_ID: IC-19132
U2 U4 U6 U8 U10 U12 U14 U16 U18 U20 U22 U24 = xensiv_pas; PN: AP3012; PROD_ID: VREG-13911
U$2-U$22 U$24 U$25 U$27-U$29 U$31-U$55 U$57-U$75 U$78-U$93 U$95-U$113 U$116-U$131 U$133-U$151 U$154-U$169 U$171-U$189 U$192-U$207 U$209-U$227 U$230-U$245 U$247-U$265 U$268-U$283 U$285-U$303 U$306-U$321 U$323-U$341 U$344-U$359 U$361-U$379 U$382-U$397 U$399-U$417 U$420-U$435 U$437-U$455 = output
U$23 U$76 U$114 U$152 U$190 U$228 U$266 U$304 U$342 U$380 U$418 U$456 = xensiv_pas